# EAGLE board Logic_Level_Converter-Panel-v13 (EAGLE 6.4), part 1 of 3
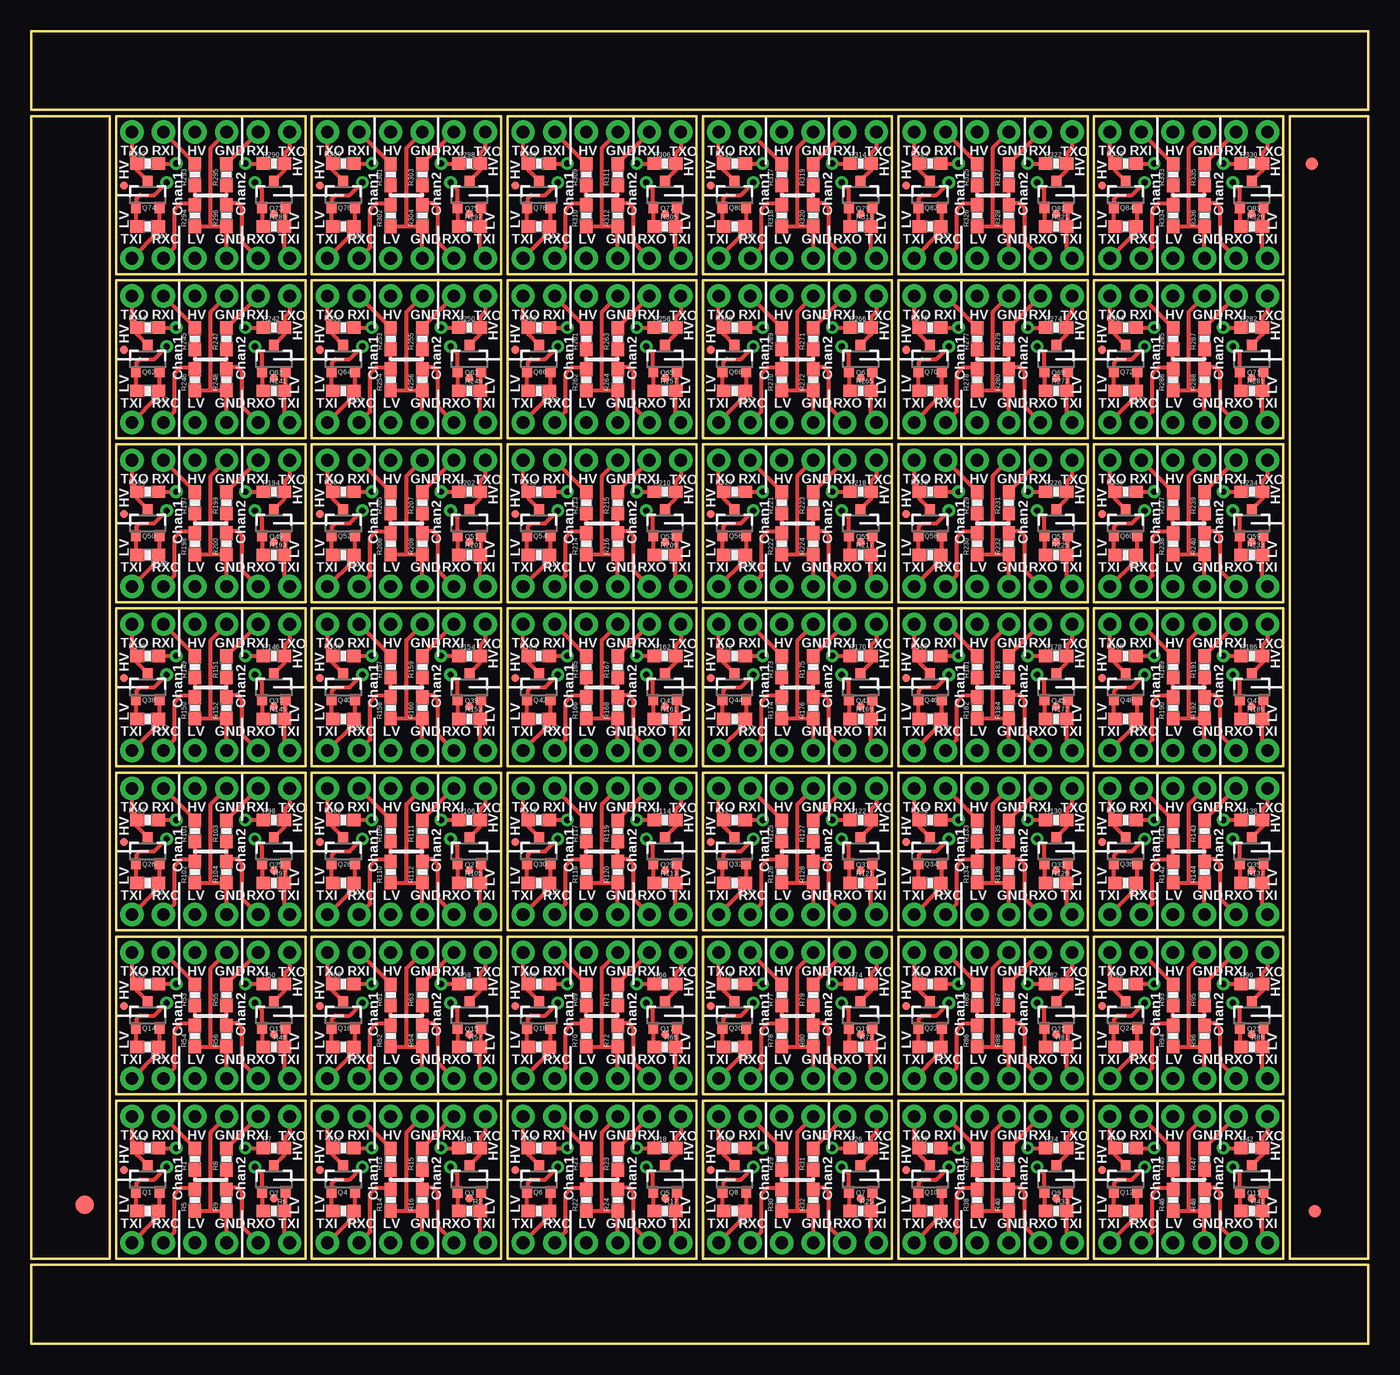
[diagram p0: board, top side]
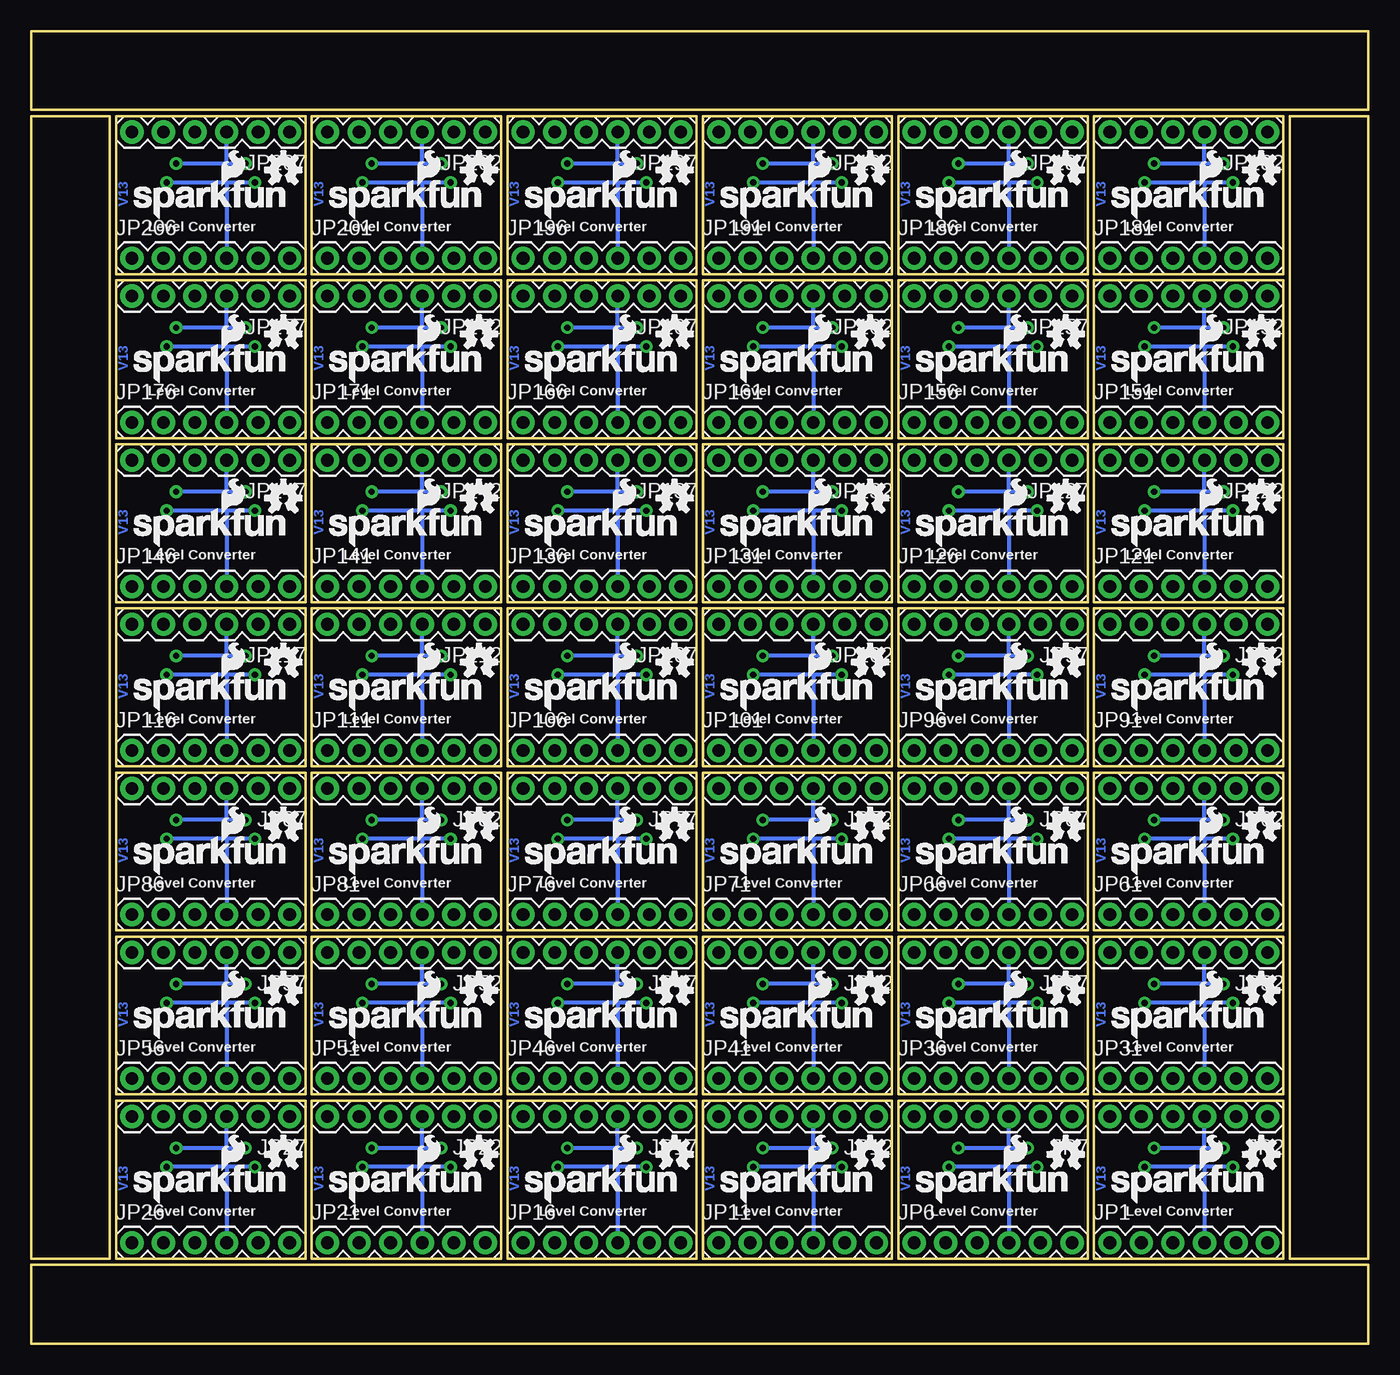
[diagram p1: board, bottom side, seen from below]

Size 107.7 x 105.66 mm. Coordinates in mm from the lower left corner, seen from the top.
Outline: 188 segments
Copper layers (1*16): Top 0.035mm / dielectric 1.5mm / Bottom 0.035mm
Design rules "SparkFun *": minimum track width 7mil, minimum drill 15mil, track to track 8mil, track to pad 8mil, pad to pad 8mil, via to via 8mil, smd to smd 8mil, copper to edge 8mil, drill to drill 8mil, minimum pad ring 12mil, minimum via ring 10mil, stop-mask expansion 4mil, vias tented up to drill 20mil, thermal gap 10mil

## Footprints (pad centres in the part's own frame; a part is rotated, then mirrored left to right if it is on the bottom)
FIDUCIAL-1.5X3 = smd 1.5 x 1.5: 1 0,0
FIDUCIAL-1X2 = smd 1 x 1: 1 0,0
1X06 = drill 1.016 pad 1.88: 1 0,0; 2 2.54,0; 3 5.08,0; 4 7.62,0; 5 10.16,0; 6 12.7,0
MICRO-FIDUCIAL = smd 0.635 x 0.635: 1 0,0
SOT23-3 = smd 0.8 x 0.9: 1 -0.95,-1; 2 0.95,-1; 3 0,1.1
0603-RES = smd 1.1 x 1: 1 -0.85,0; 2 0.85,0

## Placement (x,y rotation side)
E$1  [FIDUCIAL-1.5X3]  4.32,11.18 0 top
E$4  [FIDUCIAL-1X2]  103.38,10.67 0 top
E$5  [FIDUCIAL-1X2]  103.12,95 180 top
JP1  [1X06]  20.83,8.13 0 bottom
JP2  [1X06]  8.13,18.29 180 bottom
JP3  FIDUCIALUFIDUCIAL  [MICRO-FIDUCIAL]  19.56,11.68 0 top
JP4  FIDUCIALUFIDUCIAL  [MICRO-FIDUCIAL]  7.49,13.97 0 top
JP5  LOGO-SFENW2  [SFE-NEW-WEB]  20.7,11.3 0 bottom
JP6  [1X06]  36.58,8.13 0 bottom
JP7  [1X06]  23.88,18.29 180 bottom
JP8  FIDUCIALUFIDUCIAL  [MICRO-FIDUCIAL]  35.31,11.68 0 top
JP9  FIDUCIALUFIDUCIAL  [MICRO-FIDUCIAL]  23.24,13.97 0 top
JP10  LOGO-SFENW2  [SFE-NEW-WEB]  36.45,11.3 0 bottom
JP11  [1X06]  52.32,8.13 0 bottom
JP12  [1X06]  39.62,18.29 180 bottom
JP13  FIDUCIALUFIDUCIAL  [MICRO-FIDUCIAL]  51.05,11.68 0 top
JP14  FIDUCIALUFIDUCIAL  [MICRO-FIDUCIAL]  38.99,13.97 0 top
JP15  LOGO-SFENW2  [SFE-NEW-WEB]  52.2,11.3 0 bottom
JP16  [1X06]  68.07,8.13 0 bottom
JP17  [1X06]  55.37,18.29 180 bottom
JP18  FIDUCIALUFIDUCIAL  [MICRO-FIDUCIAL]  66.8,11.68 0 top
JP19  FIDUCIALUFIDUCIAL  [MICRO-FIDUCIAL]  54.74,13.97 0 top
JP20  LOGO-SFENW2  [SFE-NEW-WEB]  67.94,11.3 0 bottom
JP21  [1X06]  83.82,8.13 0 bottom
JP22  [1X06]  71.12,18.29 180 bottom
JP23  FIDUCIALUFIDUCIAL  [MICRO-FIDUCIAL]  82.55,11.68 0 top
JP24  FIDUCIALUFIDUCIAL  [MICRO-FIDUCIAL]  70.48,13.97 0 top
JP25  LOGO-SFENW2  [SFE-NEW-WEB]  83.69,11.3 0 bottom
JP26  [1X06]  99.57,8.13 0 bottom
JP27  [1X06]  86.87,18.29 180 bottom
JP28  FIDUCIALUFIDUCIAL  [MICRO-FIDUCIAL]  98.3,11.68 0 top
JP29  FIDUCIALUFIDUCIAL  [MICRO-FIDUCIAL]  86.23,13.97 0 top
JP30  LOGO-SFENW2  [SFE-NEW-WEB]  99.44,11.3 0 bottom
JP31  [1X06]  20.83,21.34 0 bottom
JP32  [1X06]  8.13,31.5 180 bottom
JP33  FIDUCIALUFIDUCIAL  [MICRO-FIDUCIAL]  19.56,24.89 0 top
JP34  FIDUCIALUFIDUCIAL  [MICRO-FIDUCIAL]  7.49,27.18 0 top
JP35  LOGO-SFENW2  [SFE-NEW-WEB]  20.7,24.51 0 bottom
JP36  [1X06]  36.58,21.34 0 bottom
JP37  [1X06]  23.88,31.5 180 bottom
JP38  FIDUCIALUFIDUCIAL  [MICRO-FIDUCIAL]  35.31,24.89 0 top
JP39  FIDUCIALUFIDUCIAL  [MICRO-FIDUCIAL]  23.24,27.18 0 top
JP40  LOGO-SFENW2  [SFE-NEW-WEB]  36.45,24.51 0 bottom
JP41  [1X06]  52.32,21.34 0 bottom
JP42  [1X06]  39.62,31.5 180 bottom
JP43  FIDUCIALUFIDUCIAL  [MICRO-FIDUCIAL]  51.05,24.89 0 top
JP44  FIDUCIALUFIDUCIAL  [MICRO-FIDUCIAL]  38.99,27.18 0 top
JP45  LOGO-SFENW2  [SFE-NEW-WEB]  52.2,24.51 0 bottom
JP46  [1X06]  68.07,21.34 0 bottom
JP47  [1X06]  55.37,31.5 180 bottom
JP48  FIDUCIALUFIDUCIAL  [MICRO-FIDUCIAL]  66.8,24.89 0 top
JP49  FIDUCIALUFIDUCIAL  [MICRO-FIDUCIAL]  54.74,27.18 0 top
JP50  LOGO-SFENW2  [SFE-NEW-WEB]  67.94,24.51 0 bottom
JP51  [1X06]  83.82,21.34 0 bottom
JP52  [1X06]  71.12,31.5 180 bottom
JP53  FIDUCIALUFIDUCIAL  [MICRO-FIDUCIAL]  82.55,24.89 0 top
JP54  FIDUCIALUFIDUCIAL  [MICRO-FIDUCIAL]  70.48,27.18 0 top
JP55  LOGO-SFENW2  [SFE-NEW-WEB]  83.69,24.51 0 bottom
JP56  [1X06]  99.57,21.34 0 bottom
JP57  [1X06]  86.87,31.5 180 bottom
JP58  FIDUCIALUFIDUCIAL  [MICRO-FIDUCIAL]  98.3,24.89 0 top
JP59  FIDUCIALUFIDUCIAL  [MICRO-FIDUCIAL]  86.23,27.18 0 top
JP60  LOGO-SFENW2  [SFE-NEW-WEB]  99.44,24.51 0 bottom
JP61  [1X06]  20.83,34.54 0 bottom
JP62  [1X06]  8.13,44.7 180 bottom
JP63  FIDUCIALUFIDUCIAL  [MICRO-FIDUCIAL]  19.56,38.1 0 top
JP64  FIDUCIALUFIDUCIAL  [MICRO-FIDUCIAL]  7.49,40.39 0 top
JP65  LOGO-SFENW2  [SFE-NEW-WEB]  20.7,37.72 0 bottom
JP66  [1X06]  36.58,34.54 0 bottom
JP67  [1X06]  23.88,44.7 180 bottom
JP68  FIDUCIALUFIDUCIAL  [MICRO-FIDUCIAL]  35.31,38.1 0 top
JP69  FIDUCIALUFIDUCIAL  [MICRO-FIDUCIAL]  23.24,40.39 0 top
JP70  LOGO-SFENW2  [SFE-NEW-WEB]  36.45,37.72 0 bottom
JP71  [1X06]  52.32,34.54 0 bottom
JP72  [1X06]  39.62,44.7 180 bottom
JP73  FIDUCIALUFIDUCIAL  [MICRO-FIDUCIAL]  51.05,38.1 0 top
JP74  FIDUCIALUFIDUCIAL  [MICRO-FIDUCIAL]  38.99,40.39 0 top
JP75  LOGO-SFENW2  [SFE-NEW-WEB]  52.2,37.72 0 bottom
JP76  [1X06]  68.07,34.54 0 bottom
JP77  [1X06]  55.37,44.7 180 bottom
JP78  FIDUCIALUFIDUCIAL  [MICRO-FIDUCIAL]  66.8,38.1 0 top
JP79  FIDUCIALUFIDUCIAL  [MICRO-FIDUCIAL]  54.74,40.39 0 top
JP80  LOGO-SFENW2  [SFE-NEW-WEB]  67.94,37.72 0 bottom
JP81  [1X06]  83.82,34.54 0 bottom
JP82  [1X06]  71.12,44.7 180 bottom
JP83  FIDUCIALUFIDUCIAL  [MICRO-FIDUCIAL]  82.55,38.1 0 top
JP84  FIDUCIALUFIDUCIAL  [MICRO-FIDUCIAL]  70.48,40.39 0 top
JP85  LOGO-SFENW2  [SFE-NEW-WEB]  83.69,37.72 0 bottom
JP86  [1X06]  99.57,34.54 0 bottom
JP87  [1X06]  86.87,44.7 180 bottom
JP88  FIDUCIALUFIDUCIAL  [MICRO-FIDUCIAL]  98.3,38.1 0 top
JP89  FIDUCIALUFIDUCIAL  [MICRO-FIDUCIAL]  86.23,40.39 0 top
JP90  LOGO-SFENW2  [SFE-NEW-WEB]  99.44,37.72 0 bottom
JP91  [1X06]  20.83,47.75 0 bottom
JP92  [1X06]  8.13,57.91 180 bottom
JP93  FIDUCIALUFIDUCIAL  [MICRO-FIDUCIAL]  19.56,51.31 0 top
JP94  FIDUCIALUFIDUCIAL  [MICRO-FIDUCIAL]  7.49,53.59 0 top
JP95  LOGO-SFENW2  [SFE-NEW-WEB]  20.7,50.93 0 bottom
JP96  [1X06]  36.58,47.75 0 bottom
JP97  [1X06]  23.88,57.91 180 bottom
JP98  FIDUCIALUFIDUCIAL  [MICRO-FIDUCIAL]  35.31,51.31 0 top
JP99  FIDUCIALUFIDUCIAL  [MICRO-FIDUCIAL]  23.24,53.59 0 top
JP100  LOGO-SFENW2  [SFE-NEW-WEB]  36.45,50.93 0 bottom
JP101  [1X06]  52.32,47.75 0 bottom
JP102  [1X06]  39.62,57.91 180 bottom
JP103  FIDUCIALUFIDUCIAL  [MICRO-FIDUCIAL]  51.05,51.31 0 top
JP104  FIDUCIALUFIDUCIAL  [MICRO-FIDUCIAL]  38.99,53.59 0 top
JP105  LOGO-SFENW2  [SFE-NEW-WEB]  52.2,50.93 0 bottom
JP106  [1X06]  68.07,47.75 0 bottom
JP107  [1X06]  55.37,57.91 180 bottom
JP108  FIDUCIALUFIDUCIAL  [MICRO-FIDUCIAL]  66.8,51.31 0 top
JP109  FIDUCIALUFIDUCIAL  [MICRO-FIDUCIAL]  54.74,53.59 0 top
JP110  LOGO-SFENW2  [SFE-NEW-WEB]  67.94,50.93 0 bottom
JP111  [1X06]  83.82,47.75 0 bottom
JP112  [1X06]  71.12,57.91 180 bottom
JP113  FIDUCIALUFIDUCIAL  [MICRO-FIDUCIAL]  82.55,51.31 0 top
JP114  FIDUCIALUFIDUCIAL  [MICRO-FIDUCIAL]  70.48,53.59 0 top
JP115  LOGO-SFENW2  [SFE-NEW-WEB]  83.69,50.93 0 bottom
JP116  [1X06]  99.57,47.75 0 bottom
JP117  [1X06]  86.87,57.91 180 bottom
JP118  FIDUCIALUFIDUCIAL  [MICRO-FIDUCIAL]  98.3,51.31 0 top
JP119  FIDUCIALUFIDUCIAL  [MICRO-FIDUCIAL]  86.23,53.59 0 top
JP120  LOGO-SFENW2  [SFE-NEW-WEB]  99.44,50.93 0 bottom
JP121  [1X06]  20.83,60.96 0 bottom
JP122  [1X06]  8.13,71.12 180 bottom
JP123  FIDUCIALUFIDUCIAL  [MICRO-FIDUCIAL]  19.56,64.52 0 top
JP124  FIDUCIALUFIDUCIAL  [MICRO-FIDUCIAL]  7.49,66.8 0 top
JP125  LOGO-SFENW2  [SFE-NEW-WEB]  20.7,64.14 0 bottom
JP126  [1X06]  36.58,60.96 0 bottom
JP127  [1X06]  23.88,71.12 180 bottom
JP128  FIDUCIALUFIDUCIAL  [MICRO-FIDUCIAL]  35.31,64.52 0 top
JP129  FIDUCIALUFIDUCIAL  [MICRO-FIDUCIAL]  23.24,66.8 0 top
JP130  LOGO-SFENW2  [SFE-NEW-WEB]  36.45,64.14 0 bottom
JP131  [1X06]  52.32,60.96 0 bottom
JP132  [1X06]  39.62,71.12 180 bottom
JP133  FIDUCIALUFIDUCIAL  [MICRO-FIDUCIAL]  51.05,64.52 0 top
JP134  FIDUCIALUFIDUCIAL  [MICRO-FIDUCIAL]  38.99,66.8 0 top
JP135  LOGO-SFENW2  [SFE-NEW-WEB]  52.2,64.14 0 bottom
JP136  [1X06]  68.07,60.96 0 bottom
JP137  [1X06]  55.37,71.12 180 bottom
JP138  FIDUCIALUFIDUCIAL  [MICRO-FIDUCIAL]  66.8,64.52 0 top
JP139  FIDUCIALUFIDUCIAL  [MICRO-FIDUCIAL]  54.74,66.8 0 top
JP140  LOGO-SFENW2  [SFE-NEW-WEB]  67.94,64.14 0 bottom
JP141  [1X06]  83.82,60.96 0 bottom
JP142  [1X06]  71.12,71.12 180 bottom
JP143  FIDUCIALUFIDUCIAL  [MICRO-FIDUCIAL]  82.55,64.52 0 top
JP144  FIDUCIALUFIDUCIAL  [MICRO-FIDUCIAL]  70.48,66.8 0 top
JP145  LOGO-SFENW2  [SFE-NEW-WEB]  83.69,64.14 0 bottom
JP146  [1X06]  99.57,60.96 0 bottom
JP147  [1X06]  86.87,71.12 180 bottom
JP148  FIDUCIALUFIDUCIAL  [MICRO-FIDUCIAL]  98.3,64.52 0 top
JP149  FIDUCIALUFIDUCIAL  [MICRO-FIDUCIAL]  86.23,66.8 0 top
JP150  LOGO-SFENW2  [SFE-NEW-WEB]  99.44,64.14 0 bottom
JP151  [1X06]  20.83,74.17 0 bottom
JP152  [1X06]  8.13,84.33 180 bottom
JP153  FIDUCIALUFIDUCIAL  [MICRO-FIDUCIAL]  19.56,77.72 0 top
JP154  FIDUCIALUFIDUCIAL  [MICRO-FIDUCIAL]  7.49,80.01 0 top
JP155  LOGO-SFENW2  [SFE-NEW-WEB]  20.7,77.34 0 bottom
JP156  [1X06]  36.58,74.17 0 bottom
JP157  [1X06]  23.88,84.33 180 bottom
JP158  FIDUCIALUFIDUCIAL  [MICRO-FIDUCIAL]  35.31,77.72 0 top
JP159  FIDUCIALUFIDUCIAL  [MICRO-FIDUCIAL]  23.24,80.01 0 top
JP160  LOGO-SFENW2  [SFE-NEW-WEB]  36.45,77.34 0 bottom
JP161  [1X06]  52.32,74.17 0 bottom
JP162  [1X06]  39.62,84.33 180 bottom
JP163  FIDUCIALUFIDUCIAL  [MICRO-FIDUCIAL]  51.05,77.72 0 top
JP164  FIDUCIALUFIDUCIAL  [MICRO-FIDUCIAL]  38.99,80.01 0 top
JP165  LOGO-SFENW2  [SFE-NEW-WEB]  52.2,77.34 0 bottom
JP166  [1X06]  68.07,74.17 0 bottom
JP167  [1X06]  55.37,84.33 180 bottom
JP168  FIDUCIALUFIDUCIAL  [MICRO-FIDUCIAL]  66.8,77.72 0 top
JP169  FIDUCIALUFIDUCIAL  [MICRO-FIDUCIAL]  54.74,80.01 0 top
JP170  LOGO-SFENW2  [SFE-NEW-WEB]  67.94,77.34 0 bottom
JP171  [1X06]  83.82,74.17 0 bottom
JP172  [1X06]  71.12,84.33 180 bottom
JP173  FIDUCIALUFIDUCIAL  [MICRO-FIDUCIAL]  82.55,77.72 0 top
JP174  FIDUCIALUFIDUCIAL  [MICRO-FIDUCIAL]  70.48,80.01 0 top
JP175  LOGO-SFENW2  [SFE-NEW-WEB]  83.69,77.34 0 bottom
JP176  [1X06]  99.57,74.17 0 bottom
JP177  [1X06]  86.87,84.33 180 bottom
JP178  FIDUCIALUFIDUCIAL  [MICRO-FIDUCIAL]  98.3,77.72 0 top
JP179  FIDUCIALUFIDUCIAL  [MICRO-FIDUCIAL]  86.23,80.01 0 top
JP180  LOGO-SFENW2  [SFE-NEW-WEB]  99.44,77.34 0 bottom
JP181  [1X06]  20.83,87.38 0 bottom
JP182  [1X06]  8.13,97.54 180 bottom
JP183  FIDUCIALUFIDUCIAL  [MICRO-FIDUCIAL]  19.56,90.93 0 top
JP184  FIDUCIALUFIDUCIAL  [MICRO-FIDUCIAL]  7.49,93.22 0 top
JP185  LOGO-SFENW2  [SFE-NEW-WEB]  20.7,90.55 0 bottom
JP186  [1X06]  36.58,87.38 0 bottom
JP187  [1X06]  23.88,97.54 180 bottom
JP188  FIDUCIALUFIDUCIAL  [MICRO-FIDUCIAL]  35.31,90.93 0 top
JP189  FIDUCIALUFIDUCIAL  [MICRO-FIDUCIAL]  23.24,93.22 0 top
JP190  LOGO-SFENW2  [SFE-NEW-WEB]  36.45,90.55 0 bottom
JP191  [1X06]  52.32,87.38 0 bottom
JP192  [1X06]  39.62,97.54 180 bottom
JP193  FIDUCIALUFIDUCIAL  [MICRO-FIDUCIAL]  51.05,90.93 0 top
JP194  FIDUCIALUFIDUCIAL  [MICRO-FIDUCIAL]  38.99,93.22 0 top
JP195  LOGO-SFENW2  [SFE-NEW-WEB]  52.2,90.55 0 bottom
JP196  [1X06]  68.07,87.38 0 bottom
JP197  [1X06]  55.37,97.54 180 bottom
JP198  FIDUCIALUFIDUCIAL  [MICRO-FIDUCIAL]  66.8,90.93 0 top
JP199  FIDUCIALUFIDUCIAL  [MICRO-FIDUCIAL]  54.74,93.22 0 top
JP200  LOGO-SFENW2  [SFE-NEW-WEB]  67.94,90.55 0 bottom
JP201  [1X06]  83.82,87.38 0 bottom
JP202  [1X06]  71.12,97.54 180 bottom
JP203  FIDUCIALUFIDUCIAL  [MICRO-FIDUCIAL]  82.55,90.93 0 top
JP204  FIDUCIALUFIDUCIAL  [MICRO-FIDUCIAL]  70.48,93.22 0 top
JP205  LOGO-SFENW2  [SFE-NEW-WEB]  83.69,90.55 0 bottom
JP206  [1X06]  99.57,87.38 0 bottom
JP207  [1X06]  86.87,97.54 180 bottom
JP208  FIDUCIALUFIDUCIAL  [MICRO-FIDUCIAL]  98.3,90.93 0 top
JP209  FIDUCIALUFIDUCIAL  [MICRO-FIDUCIAL]  86.23,93.22 0 top
JP210  LOGO-SFENW2  [SFE-NEW-WEB]  99.44,90.55 0 bottom
Q1  BSS138  [SOT23-3]  9.4,13.21 0 top
Q2  BSS138  [SOT23-3]  19.56,13.21 0 top
Q3  BSS138  [SOT23-3]  35.31,13.21 0 top
Q4  BSS138  [SOT23-3]  25.15,13.21 0 top
Q5  BSS138  [SOT23-3]  51.05,13.21 0 top
Q6  BSS138  [SOT23-3]  40.89,13.21 0 top
Q7  BSS138  [SOT23-3]  66.8,13.21 0 top
Q8  BSS138  [SOT23-3]  56.64,13.21 0 top
Q9  BSS138  [SOT23-3]  82.55,13.21 0 top
Q10  BSS138  [SOT23-3]  72.39,13.21 0 top
Q11  BSS138  [SOT23-3]  98.3,13.21 0 top
Q12  BSS138  [SOT23-3]  88.14,13.21 0 top
Q13  BSS138  [SOT23-3]  19.56,26.42 0 top
Q14  BSS138  [SOT23-3]  9.4,26.42 0 top
Q15  BSS138  [SOT23-3]  35.31,26.42 0 top
Q16  BSS138  [SOT23-3]  25.15,26.42 0 top
Q17  BSS138  [SOT23-3]  51.05,26.42 0 top
Q18  BSS138  [SOT23-3]  40.89,26.42 0 top
Q19  BSS138  [SOT23-3]  66.8,26.42 0 top
Q20  BSS138  [SOT23-3]  56.64,26.42 0 top
Q21  BSS138  [SOT23-3]  82.55,26.42 0 top
Q22  BSS138  [SOT23-3]  72.39,26.42 0 top
Q23  BSS138  [SOT23-3]  98.3,26.42 0 top
Q24  BSS138  [SOT23-3]  88.14,26.42 0 top
Q25  BSS138  [SOT23-3]  19.56,39.62 0 top
Q26  BSS138  [SOT23-3]  9.4,39.62 0 top
Q27  BSS138  [SOT23-3]  35.31,39.62 0 top
Q28  BSS138  [SOT23-3]  25.15,39.62 0 top
Q29  BSS138  [SOT23-3]  51.05,39.62 0 top
Q30  BSS138  [SOT23-3]  40.89,39.62 0 top
Q31  BSS138  [SOT23-3]  66.8,39.62 0 top
Q32  BSS138  [SOT23-3]  56.64,39.62 0 top
Q33  BSS138  [SOT23-3]  82.55,39.62 0 top
Q34  BSS138  [SOT23-3]  72.39,39.62 0 top
Q35  BSS138  [SOT23-3]  98.3,39.62 0 top
Q36  BSS138  [SOT23-3]  88.14,39.62 0 top
Q37  BSS138  [SOT23-3]  19.56,52.83 0 top
Q38  BSS138  [SOT23-3]  9.4,52.83 0 top
Q39  BSS138  [SOT23-3]  35.31,52.83 0 top
Q40  BSS138  [SOT23-3]  25.15,52.83 0 top
Q41  BSS138  [SOT23-3]  51.05,52.83 0 top
Q42  BSS138  [SOT23-3]  40.89,52.83 0 top
Q43  BSS138  [SOT23-3]  66.8,52.83 0 top
Q44  BSS138  [SOT23-3]  56.64,52.83 0 top
Q45  BSS138  [SOT23-3]  82.55,52.83 0 top
Q46  BSS138  [SOT23-3]  72.39,52.83 0 top
Q47  BSS138  [SOT23-3]  98.3,52.83 0 top
Q48  BSS138  [SOT23-3]  88.14,52.83 0 top
Q49  BSS138  [SOT23-3]  19.56,66.04 0 top
Q50  BSS138  [SOT23-3]  9.4,66.04 0 top
Q51  BSS138  [SOT23-3]  35.31,66.04 0 top
Q52  BSS138  [SOT23-3]  25.15,66.04 0 top
Q53  BSS138  [SOT23-3]  51.05,66.04 0 top
Q54  BSS138  [SOT23-3]  40.89,66.04 0 top
Q55  BSS138  [SOT23-3]  66.8,66.04 0 top
Q56  BSS138  [SOT23-3]  56.64,66.04 0 top
Q57  BSS138  [SOT23-3]  82.55,66.04 0 top
Q58  BSS138  [SOT23-3]  72.39,66.04 0 top
Q59  BSS138  [SOT23-3]  98.3,66.04 0 top
Q60  BSS138  [SOT23-3]  88.14,66.04 0 top
Q61  BSS138  [SOT23-3]  19.56,79.25 0 top
Q62  BSS138  [SOT23-3]  9.4,79.25 0 top
Q63  BSS138  [SOT23-3]  35.31,79.25 0 top
Q64  BSS138  [SOT23-3]  25.15,79.25 0 top
Q65  BSS138  [SOT23-3]  51.05,79.25 0 top
Q66  BSS138  [SOT23-3]  40.89,79.25 0 top
Q67  BSS138  [SOT23-3]  66.8,79.25 0 top
Q68  BSS138  [SOT23-3]  56.64,79.25 0 top
Q69  BSS138  [SOT23-3]  82.55,79.25 0 top
Q70  BSS138  [SOT23-3]  72.39,79.25 0 top
Q71  BSS138  [SOT23-3]  98.3,79.25 0 top
Q72  BSS138  [SOT23-3]  88.14,79.25 0 top
Q73  BSS138  [SOT23-3]  19.56,92.46 0 top
Q74  BSS138  [SOT23-3]  9.4,92.46 0 top
Q75  BSS138  [SOT23-3]  35.31,92.46 0 top
Q76  BSS138  [SOT23-3]  25.15,92.46 0 top
Q77  BSS138  [SOT23-3]  51.05,92.46 0 top
Q78  BSS138  [SOT23-3]  40.89,92.46 0 top
Q79  BSS138  [SOT23-3]  66.8,92.46 0 top
Q80  BSS138  [SOT23-3]  56.64,92.46 0 top
Q81  BSS138  [SOT23-3]  82.55,92.46 0 top
Q82  BSS138  [SOT23-3]  72.39,92.46 0 top
Q83  BSS138  [SOT23-3]  98.3,92.46 0 top
Q84  BSS138  [SOT23-3]  88.14,92.46 0 top
R1  10K  [0603-RES]  13.21,14.86 90 top
R2  10K  [0603-RES]  35.31,10.67 0 top
R3  10K  [0603-RES]  9.4,10.67 0 top
R4  10K  [0603-RES]  9.4,15.75 180 top
R5  20K  [0603-RES]  13.21,11.56 90 top
R6  10K  [0603-RES]  19.56,10.67 0 top
R7  10K  [0603-RES]  19.56,15.75 0 top
R8  10K  [0603-RES]  15.75,14.86 90 top
R9  20K  [0603-RES]  15.75,11.56 90 top
R10  10K  [0603-RES]  35.31,15.75 0 top
R11  10K  [0603-RES]  25.15,10.67 0 top
R12  10K  [0603-RES]  25.15,15.75 180 top
R13  10K  [0603-RES]  28.96,14.86 90 top
R14  20K  [0603-RES]  28.96,11.56 90 top
R15  10K  [0603-RES]  31.5,14.86 90 top
R16  20K  [0603-RES]  31.5,11.56 90 top
R17  10K  [0603-RES]  51.05,10.67 0 top
R18  10K  [0603-RES]  51.05,15.75 0 top
R19  10K  [0603-RES]  40.89,10.67 0 top
R20  10K  [0603-RES]  40.89,15.75 180 top
R21  10K  [0603-RES]  44.7,14.86 90 top
R22  20K  [0603-RES]  44.7,11.56 90 top
R23  10K  [0603-RES]  47.24,14.86 90 top
R24  20K  [0603-RES]  47.24,11.56 90 top
R25  10K  [0603-RES]  66.8,10.67 0 top
R26  10K  [0603-RES]  66.8,15.75 0 top
R27  10K  [0603-RES]  56.64,10.67 0 top
R28  10K  [0603-RES]  56.64,15.75 180 top
R29  10K  [0603-RES]  60.45,14.86 90 top
R30  20K  [0603-RES]  60.45,11.56 90 top
R31  10K  [0603-RES]  62.99,14.86 90 top
R32  20K  [0603-RES]  62.99,11.56 90 top
R33  10K  [0603-RES]  82.55,10.67 0 top
R34  10K  [0603-RES]  82.55,15.75 0 top
R35  10K  [0603-RES]  72.39,10.67 0 top
R36  10K  [0603-RES]  72.39,15.75 180 top
R37  10K  [0603-RES]  76.2,14.86 90 top
R38  20K  [0603-RES]  76.2,11.56 90 top
R39  10K  [0603-RES]  78.74,14.86 90 top
R40  20K  [0603-RES]  78.74,11.56 90 top
R41  10K  [0603-RES]  98.3,10.67 0 top
R42  10K  [0603-RES]  98.3,15.75 0 top
R43  10K  [0603-RES]  88.14,10.67 0 top
R44  10K  [0603-RES]  88.14,15.75 180 top
R45  10K  [0603-RES]  91.95,14.86 90 top
R46  20K  [0603-RES]  91.95,11.56 90 top
R47  10K  [0603-RES]  94.49,14.86 90 top
R48  20K  [0603-RES]  94.49,11.56 90 top
R49  10K  [0603-RES]  19.56,23.88 0 top
R50  10K  [0603-RES]  19.56,28.96 0 top
R51  10K  [0603-RES]  9.4,23.88 0 top
R52  10K  [0603-RES]  9.4,28.96 180 top
R53  10K  [0603-RES]  13.21,28.07 90 top
R54  20K  [0603-RES]  13.21,24.77 90 top
R55  10K  [0603-RES]  15.75,28.07 90 top
R56  20K  [0603-RES]  15.75,24.77 90 top
R57  10K  [0603-RES]  35.31,23.88 0 top
R58  10K  [0603-RES]  35.31,28.96 0 top
R59  10K  [0603-RES]  25.15,23.88 0 top
R60  10K  [0603-RES]  25.15,28.96 180 top
R61  10K  [0603-RES]  28.96,28.07 90 top
R62  20K  [0603-RES]  28.96,24.77 90 top
R63  10K  [0603-RES]  31.5,28.07 90 top
R64  20K  [0603-RES]  31.5,24.77 90 top
R65  10K  [0603-RES]  51.05,23.88 0 top
R66  10K  [0603-RES]  51.05,28.96 0 top
R67  10K  [0603-RES]  40.89,23.88 0 top
R68  10K  [0603-RES]  40.89,28.96 180 top
R69  10K  [0603-RES]  44.7,28.07 90 top
R70  20K  [0603-RES]  44.7,24.77 90 top
R71  10K  [0603-RES]  47.24,28.07 90 top
R72  20K  [0603-RES]  47.24,24.77 90 top
R73  10K  [0603-RES]  66.8,23.88 0 top
R74  10K  [0603-RES]  66.8,28.96 0 top
R75  10K  [0603-RES]  56.64,23.88 0 top
R76  10K  [0603-RES]  56.64,28.96 180 top
R77  10K  [0603-RES]  60.45,28.07 90 top
R78  20K  [0603-RES]  60.45,24.77 90 top
R79  10K  [0603-RES]  62.99,28.07 90 top
R80  20K  [0603-RES]  62.99,24.77 90 top
R81  10K  [0603-RES]  82.55,23.88 0 top
R82  10K  [0603-RES]  82.55,28.96 0 top
R83  10K  [0603-RES]  72.39,23.88 0 top
R84  10K  [0603-RES]  72.39,28.96 180 top
R85  10K  [0603-RES]  76.2,28.07 90 top
R86  20K  [0603-RES]  76.2,24.77 90 top
R87  10K  [0603-RES]  78.74,28.07 90 top
R88  20K  [0603-RES]  78.74,24.77 90 top
R89  10K  [0603-RES]  98.3,23.88 0 top
R90  10K  [0603-RES]  98.3,28.96 0 top
R91  10K  [0603-RES]  88.14,23.88 0 top
R92  10K  [0603-RES]  88.14,28.96 180 top
R93  10K  [0603-RES]  91.95,28.07 90 top
R94  20K  [0603-RES]  91.95,24.77 90 top
R95  10K  [0603-RES]  94.49,28.07 90 top
R96  20K  [0603-RES]  94.49,24.77 90 top
R97  10K  [0603-RES]  19.56,37.08 0 top
R98  10K  [0603-RES]  19.56,42.16 0 top
R99  10K  [0603-RES]  9.4,37.08 0 top
R100  10K  [0603-RES]  9.4,42.16 180 top
R101  10K  [0603-RES]  13.21,41.27 90 top
R102  20K  [0603-RES]  13.21,37.97 90 top
R103  10K  [0603-RES]  15.75,41.27 90 top
R104  20K  [0603-RES]  15.75,37.97 90 top
R105  10K  [0603-RES]  35.31,37.08 0 top
R106  10K  [0603-RES]  35.31,42.16 0 top
R107  10K  [0603-RES]  25.15,37.08 0 top
R108  10K  [0603-RES]  25.15,42.16 180 top
R109  10K  [0603-RES]  28.96,41.27 90 top
R110  20K  [0603-RES]  28.96,37.97 90 top
R111  10K  [0603-RES]  31.5,41.27 90 top
R112  20K  [0603-RES]  31.5,37.97 90 top
R113  10K  [0603-RES]  51.05,37.08 0 top
R114  10K  [0603-RES]  51.05,42.16 0 top
R115  10K  [0603-RES]  40.89,37.08 0 top
R116  10K  [0603-RES]  40.89,42.16 180 top
R117  10K  [0603-RES]  44.7,41.27 90 top
R118  20K  [0603-RES]  44.7,37.97 90 top
R119  10K  [0603-RES]  47.24,41.27 90 top
R120  20K  [0603-RES]  47.24,37.97 90 top
R121  10K  [0603-RES]  66.8,37.08 0 top
R122  10K  [0603-RES]  66.8,42.16 0 top
R123  10K  [0603-RES]  56.64,37.08 0 top
R124  10K  [0603-RES]  56.64,42.16 180 top
R125  10K  [0603-RES]  60.45,41.27 90 top
R126  20K  [0603-RES]  60.45,37.97 90 top
R127  10K  [0603-RES]  62.99,41.27 90 top
R128  20K  [0603-RES]  62.99,37.97 90 top
R129  10K  [0603-RES]  82.55,37.08 0 top
R130  10K  [0603-RES]  82.55,42.16 0 top
R131  10K  [0603-RES]  72.39,37.08 0 top
R132  10K  [0603-RES]  72.39,42.16 180 top
R133  10K  [0603-RES]  76.2,41.27 90 top
R134  20K  [0603-RES]  76.2,37.97 90 top
R135  10K  [0603-RES]  78.74,41.27 90 top
R136  20K  [0603-RES]  78.74,37.97 90 top
R137  10K  [0603-RES]  98.3,37.08 0 top
R138  10K  [0603-RES]  98.3,42.16 0 top
R139  10K  [0603-RES]  88.14,37.08 0 top
R140  10K  [0603-RES]  88.14,42.16 180 top
R141  10K  [0603-RES]  91.95,41.27 90 top
R142  20K  [0603-RES]  91.95,37.97 90 top
R143  10K  [0603-RES]  94.49,41.27 90 top
R144  20K  [0603-RES]  94.49,37.97 90 top
R145  10K  [0603-RES]  19.56,50.29 0 top
R146  10K  [0603-RES]  19.56,55.37 0 top
R147  10K  [0603-RES]  9.4,50.29 0 top
R148  10K  [0603-RES]  9.4,55.37 180 top
R149  10K  [0603-RES]  13.21,54.48 90 top
R150  20K  [0603-RES]  13.21,51.18 90 top
R151  10K  [0603-RES]  15.75,54.48 90 top
R152  20K  [0603-RES]  15.75,51.18 90 top
R153  10K  [0603-RES]  35.31,50.29 0 top
R154  10K  [0603-RES]  35.31,55.37 0 top
R155  10K  [0603-RES]  25.15,50.29 0 top
R156  10K  [0603-RES]  25.15,55.37 180 top
R157  10K  [0603-RES]  28.96,54.48 90 top
R158  20K  [0603-RES]  28.96,51.18 90 top
R159  10K  [0603-RES]  31.5,54.48 90 top
R160  20K  [0603-RES]  31.5,51.18 90 top
R161  10K  [0603-RES]  51.05,50.29 0 top
R162  10K  [0603-RES]  51.05,55.37 0 top
R163  10K  [0603-RES]  40.89,50.29 0 top
R164  10K  [0603-RES]  40.89,55.37 180 top
R165  10K  [0603-RES]  44.7,54.48 90 top
R166  20K  [0603-RES]  44.7,51.18 90 top
R167  10K  [0603-RES]  47.24,54.48 90 top
R168  20K  [0603-RES]  47.24,51.18 90 top
R169  10K  [0603-RES]  66.8,50.29 0 top
R170  10K  [0603-RES]  66.8,55.37 0 top
R171  10K  [0603-RES]  56.64,50.29 0 top
R172  10K  [0603-RES]  56.64,55.37 180 top
R173  10K  [0603-RES]  60.45,54.48 90 top
R174  20K  [0603-RES]  60.45,51.18 90 top
R175  10K  [0603-RES]  62.99,54.48 90 top
R176  20K  [0603-RES]  62.99,51.18 90 top
R177  10K  [0603-RES]  82.55,50.29 0 top
R178  10K  [0603-RES]  82.55,55.37 0 top
R179  10K  [0603-RES]  72.39,50.29 0 top
R180  10K  [0603-RES]  72.39,55.37 180 top
R181  10K  [0603-RES]  76.2,54.48 90 top
R182  20K  [0603-RES]  76.2,51.18 90 top
R183  10K  [0603-RES]  78.74,54.48 90 top
R184  20K  [0603-RES]  78.74,51.18 90 top
R185  10K  [0603-RES]  98.3,50.29 0 top
R186  10K  [0603-RES]  98.3,55.37 0 top
R187  10K  [0603-RES]  88.14,50.29 0 top
R188  10K  [0603-RES]  88.14,55.37 180 top
R189  10K  [0603-RES]  91.95,54.48 90 top
R190  20K  [0603-RES]  91.95,51.18 90 top
R191  10K  [0603-RES]  94.49,54.48 90 top
R192  20K  [0603-RES]  94.49,51.18 90 top
R193  10K  [0603-RES]  19.56,63.5 0 top
R194  10K  [0603-RES]  19.56,68.58 0 top
R195  10K  [0603-RES]  9.4,63.5 0 top
R196  10K  [0603-RES]  9.4,68.58 180 top
R197  10K  [0603-RES]  13.21,67.69 90 top
R198  20K  [0603-RES]  13.21,64.39 90 top
R199  10K  [0603-RES]  15.75,67.69 90 top
R200  20K  [0603-RES]  15.75,64.39 90 top
R201  10K  [0603-RES]  35.31,63.5 0 top
R202  10K  [0603-RES]  35.31,68.58 0 top
R203  10K  [0603-RES]  25.15,63.5 0 top
R204  10K  [0603-RES]  25.15,68.58 180 top
R205  10K  [0603-RES]  28.96,67.69 90 top
R206  20K  [0603-RES]  28.96,64.39 90 top
R207  10K  [0603-RES]  31.5,67.69 90 top
R208  20K  [0603-RES]  31.5,64.39 90 top
R209  10K  [0603-RES]  51.05,63.5 0 top
R210  10K  [0603-RES]  51.05,68.58 0 top
R211  10K  [0603-RES]  40.89,63.5 0 top
R212  10K  [0603-RES]  40.89,68.58 180 top
R213  10K  [0603-RES]  44.7,67.69 90 top
R214  20K  [0603-RES]  44.7,64.39 90 top
R215  10K  [0603-RES]  47.24,67.69 90 top
R216  20K  [0603-RES]  47.24,64.39 90 top
R217  10K  [0603-RES]  66.8,63.5 0 top
R218  10K  [0603-RES]  66.8,68.58 0 top
R219  10K  [0603-RES]  56.64,63.5 0 top
R220  10K  [0603-RES]  56.64,68.58 180 top
R221  10K  [0603-RES]  60.45,67.69 90 top
R222  20K  [0603-RES]  60.45,64.39 90 top
R223  10K  [0603-RES]  62.99,67.69 90 top
R224  20K  [0603-RES]  62.99,64.39 90 top
R225  10K  [0603-RES]  82.55,63.5 0 top
R226  10K  [0603-RES]  82.55,68.58 0 top
R227  10K  [0603-RES]  72.39,63.5 0 top
R228  10K  [0603-RES]  72.39,68.58 180 top
R229  10K  [0603-RES]  76.2,67.69 90 top
R230  20K  [0603-RES]  76.2,64.39 90 top
R231  10K  [0603-RES]  78.74,67.69 90 top
R232  20K  [0603-RES]  78.74,64.39 90 top
R233  10K  [0603-RES]  98.3,63.5 0 top
R234  10K  [0603-RES]  98.3,68.58 0 top
R235  10K  [0603-RES]  88.14,63.5 0 top
R236  10K  [0603-RES]  88.14,68.58 180 top
R237  10K  [0603-RES]  91.95,67.69 90 top
R238  20K  [0603-RES]  91.95,64.39 90 top
R239  10K  [0603-RES]  94.49,67.69 90 top
R240  20K  [0603-RES]  94.49,64.39 90 top
R241  10K  [0603-RES]  19.56,76.71 0 top
R242  10K  [0603-RES]  19.56,81.79 0 top
R243  10K  [0603-RES]  9.4,76.71 0 top
R244  10K  [0603-RES]  9.4,81.79 180 top
R245  10K  [0603-RES]  13.21,80.9 90 top
R246  20K  [0603-RES]  13.21,77.6 90 top
R247  10K  [0603-RES]  15.75,80.9 90 top
R248  20K  [0603-RES]  15.75,77.6 90 top
R249  10K  [0603-RES]  35.31,76.71 0 top
R250  10K  [0603-RES]  35.31,81.79 0 top
R251  10K  [0603-RES]  25.15,76.71 0 top
R252  10K  [0603-RES]  25.15,81.79 180 top
R253  10K  [0603-RES]  28.96,80.9 90 top
R254  20K  [0603-RES]  28.96,77.6 90 top
R255  10K  [0603-RES]  31.5,80.9 90 top
R256  20K  [0603-RES]  31.5,77.6 90 top
R257  10K  [0603-RES]  51.05,76.71 0 top
R258  10K  [0603-RES]  51.05,81.79 0 top
R259  10K  [0603-RES]  40.89,76.71 0 top
R260  10K  [0603-RES]  40.89,81.79 180 top
R261  10K  [0603-RES]  44.7,80.9 90 top
R262  20K  [0603-RES]  44.7,77.6 90 top
R263  10K  [0603-RES]  47.24,80.9 90 top
R264  20K  [0603-RES]  47.24,77.6 90 top
R265  10K  [0603-RES]  66.8,76.71 0 top
R266  10K  [0603-RES]  66.8,81.79 0 top
R267  10K  [0603-RES]  56.64,76.71 0 top
R268  10K  [0603-RES]  56.64,81.79 180 top
R269  10K  [0603-RES]  60.45,80.9 90 top
R270  20K  [0603-RES]  60.45,77.6 90 top
R271  10K  [0603-RES]  62.99,80.9 90 top
R272  20K  [0603-RES]  62.99,77.6 90 top
R273  10K  [0603-RES]  82.55,76.71 0 top
R274  10K  [0603-RES]  82.55,81.79 0 top
R275  10K  [0603-RES]  72.39,76.71 0 top
R276  10K  [0603-RES]  72.39,81.79 180 top
R277  10K  [0603-RES]  76.2,80.9 90 top
R278  20K  [0603-RES]  76.2,77.6 90 top
R279  10K  [0603-RES]  78.74,80.9 90 top
R280  20K  [0603-RES]  78.74,77.6 90 top
R281  10K  [0603-RES]  98.3,76.71 0 top
R282  10K  [0603-RES]  98.3,81.79 0 top
R283  10K  [0603-RES]  88.14,76.71 0 top
R284  10K  [0603-RES]  88.14,81.79 180 top
R285  10K  [0603-RES]  91.95,80.9 90 top
R286  20K  [0603-RES]  91.95,77.6 90 top
R287  10K  [0603-RES]  94.49,80.9 90 top
R288  20K  [0603-RES]  94.49,77.6 90 top
R289  10K  [0603-RES]  19.56,89.92 0 top
R290  10K  [0603-RES]  19.56,95 0 top
R291  10K  [0603-RES]  9.4,89.92 0 top
R292  10K  [0603-RES]  9.4,95 180 top
R293  10K  [0603-RES]  13.21,94.11 90 top
R294  20K  [0603-RES]  13.21,90.81 90 top
R295  10K  [0603-RES]  15.75,94.11 90 top
R296  20K  [0603-RES]  15.75,90.81 90 top
R297  10K  [0603-RES]  35.31,89.92 0 top
R298  10K  [0603-RES]  35.31,95 0 top
R299  10K  [0603-RES]  25.15,89.92 0 top
R300  10K  [0603-RES]  25.15,95 180 top
R301  10K  [0603-RES]  28.96,94.11 90 top
R302  20K  [0603-RES]  28.96,90.81 90 top
R303  10K  [0603-RES]  31.5,94.11 90 top
R304  20K  [0603-RES]  31.5,90.81 90 top
R305  10K  [0603-RES]  51.05,89.92 0 top
R306  10K  [0603-RES]  51.05,95 0 top
R307  10K  [0603-RES]  40.89,89.92 0 top
R308  10K  [0603-RES]  40.89,95 180 top
R309  10K  [0603-RES]  44.7,94.11 90 top
R310  20K  [0603-RES]  44.7,90.81 90 top
R311  10K  [0603-RES]  47.24,94.11 90 top
R312  20K  [0603-RES]  47.24,90.81 90 top
R313  10K  [0603-RES]  66.8,89.92 0 top
R314  10K  [0603-RES]  66.8,95 0 top
R315  10K  [0603-RES]  56.64,89.92 0 top
R316  10K  [0603-RES]  56.64,95 180 top
R317  10K  [0603-RES]  60.45,94.11 90 top
R318  20K  [0603-RES]  60.45,90.81 90 top
R319  10K  [0603-RES]  62.99,94.11 90 top
R320  20K  [0603-RES]  62.99,90.81 90 top
R321  10K  [0603-RES]  82.55,89.92 0 top
R322  10K  [0603-RES]  82.55,95 0 top
R323  10K  [0603-RES]  72.39,89.92 0 top
R324  10K  [0603-RES]  72.39,95 180 top
R325  10K  [0603-RES]  76.2,94.11 90 top
R326  20K  [0603-RES]  76.2,90.81 90 top
R327  10K  [0603-RES]  78.74,94.11 90 top
R328  20K  [0603-RES]  78.74,90.81 90 top
R329  10K  [0603-RES]  98.3,89.92 0 top
R330  10K  [0603-RES]  98.3,95 0 top
R331  10K  [0603-RES]  88.14,89.92 0 top
R332  10K  [0603-RES]  88.14,95 180 top
R333  10K  [0603-RES]  91.95,94.11 90 top
R334  20K  [0603-RES]  91.95,90.81 90 top
R335  10K  [0603-RES]  94.49,94.11 90 top
R336  20K  [0603-RES]  94.49,90.81 90 top
U$1  LOGO-SFESK  [SFE-LOGO-FLAME]  13.59,13.97 0 bottom
U$2  OSHW-LOGOS  [OSHW-LOGO-S]  8.64,15.24 0 bottom
U$3  LOGO-SFESK  [SFE-LOGO-FLAME]  29.34,13.97 0 bottom
U$4  OSHW-LOGOS  [OSHW-LOGO-S]  24.38,15.24 0 bottom
U$5  LOGO-SFESK  [SFE-LOGO-FLAME]  45.09,13.97 0 bottom
U$6  OSHW-LOGOS  [OSHW-LOGO-S]  40.13,15.24 0 bottom
U$7  LOGO-SFESK  [SFE-LOGO-FLAME]  60.83,13.97 0 bottom
U$8  OSHW-LOGOS  [OSHW-LOGO-S]  55.88,15.24 0 bottom
U$9  LOGO-SFESK  [SFE-LOGO-FLAME]  76.58,13.97 0 bottom
U$10  OSHW-LOGOS  [OSHW-LOGO-S]  71.63,15.24 0 bottom
U$11  LOGO-SFESK  [SFE-LOGO-FLAME]  92.33,13.97 0 bottom
U$12  OSHW-LOGOS  [OSHW-LOGO-S]  87.38,15.24 0 bottom
U$13  LOGO-SFESK  [SFE-LOGO-FLAME]  13.59,27.18 0 bottom
U$14  OSHW-LOGOS  [OSHW-LOGO-S]  8.64,28.45 0 bottom
U$15  LOGO-SFESK  [SFE-LOGO-FLAME]  29.34,27.18 0 bottom
U$16  OSHW-LOGOS  [OSHW-LOGO-S]  24.38,28.45 0 bottom
U$17  LOGO-SFESK  [SFE-LOGO-FLAME]  45.09,27.18 0 bottom
U$18  OSHW-LOGOS  [OSHW-LOGO-S]  40.13,28.45 0 bottom
U$19  LOGO-SFESK  [SFE-LOGO-FLAME]  60.83,27.18 0 bottom
U$20  OSHW-LOGOS  [OSHW-LOGO-S]  55.88,28.45 0 bottom
U$21  LOGO-SFESK  [SFE-LOGO-FLAME]  76.58,27.18 0 bottom
U$22  OSHW-LOGOS  [OSHW-LOGO-S]  71.63,28.45 0 bottom
U$23  LOGO-SFESK  [SFE-LOGO-FLAME]  92.33,27.18 0 bottom
U$24  OSHW-LOGOS  [OSHW-LOGO-S]  87.38,28.45 0 bottom
U$25  LOGO-SFESK  [SFE-LOGO-FLAME]  13.59,40.39 0 bottom
U$26  OSHW-LOGOS  [OSHW-LOGO-S]  8.64,41.66 0 bottom
U$27  LOGO-SFESK  [SFE-LOGO-FLAME]  29.34,40.39 0 bottom
U$28  OSHW-LOGOS  [OSHW-LOGO-S]  24.38,41.66 0 bottom
U$29  LOGO-SFESK  [SFE-LOGO-FLAME]  45.09,40.39 0 bottom
U$30  OSHW-LOGOS  [OSHW-LOGO-S]  40.13,41.66 0 bottom
U$31  LOGO-SFESK  [SFE-LOGO-FLAME]  60.83,40.39 0 bottom
U$32  OSHW-LOGOS  [OSHW-LOGO-S]  55.88,41.66 0 bottom
U$33  LOGO-SFESK  [SFE-LOGO-FLAME]  76.58,40.39 0 bottom
U$34  OSHW-LOGOS  [OSHW-LOGO-S]  71.63,41.66 0 bottom
U$35  LOGO-SFESK  [SFE-LOGO-FLAME]  92.33,40.39 0 bottom
U$36  OSHW-LOGOS  [OSHW-LOGO-S]  87.38,41.66 0 bottom
U$37  LOGO-SFESK  [SFE-LOGO-FLAME]  13.59,53.59 0 bottom
U$38  OSHW-LOGOS  [OSHW-LOGO-S]  8.64,54.86 0 bottom
U$39  LOGO-SFESK  [SFE-LOGO-FLAME]  29.34,53.59 0 bottom
U$40  OSHW-LOGOS  [OSHW-LOGO-S]  24.38,54.86 0 bottom
U$41  LOGO-SFESK  [SFE-LOGO-FLAME]  45.09,53.59 0 bottom
U$42  OSHW-LOGOS  [OSHW-LOGO-S]  40.13,54.86 0 bottom
U$43  LOGO-SFESK  [SFE-LOGO-FLAME]  60.83,53.59 0 bottom
U$44  OSHW-LOGOS  [OSHW-LOGO-S]  55.88,54.86 0 bottom
U$45  LOGO-SFESK  [SFE-LOGO-FLAME]  76.58,53.59 0 bottom
U$46  OSHW-LOGOS  [OSHW-LOGO-S]  71.63,54.86 0 bottom
U$47  LOGO-SFESK  [SFE-LOGO-FLAME]  92.33,53.59 0 bottom
U$48  OSHW-LOGOS  [OSHW-LOGO-S]  87.38,54.86 0 bottom
U$49  LOGO-SFESK  [SFE-LOGO-FLAME]  13.59,66.8 0 bottom
U$50  OSHW-LOGOS  [OSHW-LOGO-S]  8.64,68.07 0 bottom
U$51  LOGO-SFESK  [SFE-LOGO-FLAME]  29.34,66.8 0 bottom
U$52  OSHW-LOGOS  [OSHW-LOGO-S]  24.38,68.07 0 bottom
U$53  LOGO-SFESK  [SFE-LOGO-FLAME]  45.09,66.8 0 bottom
U$54  OSHW-LOGOS  [OSHW-LOGO-S]  40.13,68.07 0 bottom
U$55  LOGO-SFESK  [SFE-LOGO-FLAME]  60.83,66.8 0 bottom
U$56  OSHW-LOGOS  [OSHW-LOGO-S]  55.88,68.07 0 bottom
U$57  LOGO-SFESK  [SFE-LOGO-FLAME]  76.58,66.8 0 bottom
U$58  OSHW-LOGOS  [OSHW-LOGO-S]  71.63,68.07 0 bottom
U$59  LOGO-SFESK  [SFE-LOGO-FLAME]  92.33,66.8 0 bottom
U$60  OSHW-LOGOS  [OSHW-LOGO-S]  87.38,68.07 0 bottom
U$61  LOGO-SFESK  [SFE-LOGO-FLAME]  13.59,80.01 0 bottom
U$62  OSHW-LOGOS  [OSHW-LOGO-S]  8.64,81.28 0 bottom
U$63  LOGO-SFESK  [SFE-LOGO-FLAME]  29.34,80.01 0 bottom
U$64  OSHW-LOGOS  [OSHW-LOGO-S]  24.38,81.28 0 bottom
U$65  LOGO-SFESK  [SFE-LOGO-FLAME]  45.09,80.01 0 bottom
U$66  OSHW-LOGOS  [OSHW-LOGO-S]  40.13,81.28 0 bottom
U$67  LOGO-SFESK  [SFE-LOGO-FLAME]  60.83,80.01 0 bottom
U$68  OSHW-LOGOS  [OSHW-LOGO-S]  55.88,81.28 0 bottom
U$69  LOGO-SFESK  [SFE-LOGO-FLAME]  76.58,80.01 0 bottom
U$70  OSHW-LOGOS  [OSHW-LOGO-S]  71.63,81.28 0 bottom
U$71  LOGO-SFESK  [SFE-LOGO-FLAME]  92.33,80.01 0 bottom
U$72  OSHW-LOGOS  [OSHW-LOGO-S]  87.38,81.28 0 bottom
U$73  LOGO-SFESK  [SFE-LOGO-FLAME]  13.59,93.22 0 bottom
U$74  OSHW-LOGOS  [OSHW-LOGO-S]  8.64,94.49 0 bottom
U$75  LOGO-SFESK  [SFE-LOGO-FLAME]  29.34,93.22 0 bottom
U$76  OSHW-LOGOS  [OSHW-LOGO-S]  24.38,94.49 0 bottom
U$77  LOGO-SFESK  [SFE-LOGO-FLAME]  45.09,93.22 0 bottom
U$78  OSHW-LOGOS  [OSHW-LOGO-S]  40.13,94.49 0 bottom
U$79  LOGO-SFESK  [SFE-LOGO-FLAME]  60.83,93.22 0 bottom
U$80  OSHW-LOGOS  [OSHW-LOGO-S]  55.88,94.49 0 bottom
U$81  LOGO-SFESK  [SFE-LOGO-FLAME]  76.58,93.22 0 bottom
U$82  OSHW-LOGOS  [OSHW-LOGO-S]  71.63,94.49 0 bottom
U$83  LOGO-SFESK  [SFE-LOGO-FLAME]  92.33,93.22 0 bottom
U$84  OSHW-LOGOS  [OSHW-LOGO-S]  87.38,94.49 0 bottom

## Library data of the parts
E$1 E$4 E$5 JP5 JP10 JP15 JP20 JP25 JP30 JP35 JP40 JP45 JP50 JP55 JP60 JP65 JP70 JP75 JP80 JP85 JP90 JP95 JP100 JP105 JP110 JP115 JP120 JP125 JP130 JP135 JP140 JP145 JP150 JP155 JP160 JP165 JP170 JP175 JP180 JP185 JP190 JP195 JP200 JP205 JP210 U$2 U$4 U$6 U$8 U$10 U$12 U$14 U$16 U$18 U$20 U$22 U$24 U$26 U$28 U$30 U$32 U$34 U$36 U$38 U$40 U$42 U$44 U$46 U$48 U$50 U$52 U$54 U$56 U$58 U$60 U$62 U$64 U$66 U$68 U$70 U$72 U$74 U$76 U$78 U$80 U$82 U$84 = SparkFun-Aesthetics
JP1-JP4 JP6-JP9 JP11-JP14 JP16-JP19 JP21-JP24 JP26-JP29 JP31-JP34 JP36-JP39 JP41-JP44 JP46-JP49 JP51-JP54 JP56-JP59 JP61-JP64 JP66-JP69 JP71-JP74 JP76-JP79 JP81-JP84 JP86-JP89 JP91-JP94 JP96-JP99 JP101-JP104 JP106-JP109 JP111-JP114 JP116-JP119 JP121-JP124 JP126-JP129 JP131-JP134 JP136-JP139 JP141-JP144 JP146-JP149 JP151-JP154 JP156-JP159 JP161-JP164 JP166-JP169 JP171-JP174 JP176-JP179 JP181-JP184 JP186-JP189 JP191-JP194 JP196-JP199 JP201-JP204 JP206-JP209 Q1-Q84 R1-R336 U$1 U$3 U$5 U$7 U$9 U$11 U$13 U$15 U$17 U$19 U$21 U$23 U$25 U$27 U$29 U$31 U$33 U$35 U$37 U$39 U$41 U$43 U$45 U$47 U$49 U$51 U$53 U$55 U$57 U$59 U$61 U$63 U$65 U$67 U$69 U$71 U$73 U$75 U$77 U$79 U$81 U$83 = SparkFun

## Nets
GND: JP1.3 JP2.4 R5.1 R9.1
GND1: JP6.3 JP7.4 R14.1 R16.1
GND2: JP11.3 JP12.4 R22.1 R24.1
GND3: JP16.3 JP17.4 R30.1 R32.1
GND4: JP21.3 JP22.4 R38.1 R40.1
GND5: JP26.3 JP27.4 R46.1 R48.1
GND6: JP31.3 JP32.4 R54.1 R56.1
GND7: JP36.3 JP37.4 R62.1 R64.1
GND8: JP41.3 JP42.4 R70.1 R72.1
GND9: JP46.3 JP47.4 R78.1 R80.1
GND10: JP51.3 JP52.4 R86.1 R88.1
GND11: JP56.3 JP57.4 R94.1 R96.1
GND12: JP61.3 JP62.4 R102.1 R104.1
GND13: JP66.3 JP67.4 R110.1 R112.1
GND14: JP71.3 JP72.4 R118.1 R120.1
GND15: JP76.3 JP77.4 R126.1 R128.1
GND16: JP81.3 JP82.4 R134.1 R136.1
GND17: JP86.3 JP87.4 R142.1 R144.1
GND18: JP91.3 JP92.4 R150.1 R152.1
GND19: JP96.3 JP97.4 R158.1 R160.1
GND20: JP101.3 JP102.4 R166.1 R168.1
GND21: JP106.3 JP107.4 R174.1 R176.1
GND22: JP111.3 JP112.4 R182.1 R184.1
GND23: JP116.3 JP117.4 R190.1 R192.1
GND24: JP121.3 JP122.4 R198.1 R200.1
GND25: JP126.3 JP127.4 R206.1 R208.1
GND26: JP131.3 JP132.4 R214.1 R216.1
GND27: JP136.3 JP137.4 R222.1 R224.1
GND28: JP141.3 JP142.4 R230.1 R232.1
GND29: JP146.3 JP147.4 R238.1 R240.1
GND30: JP151.3 JP152.4 R246.1 R248.1
GND31: JP156.3 JP157.4 R254.1 R256.1
GND32: JP161.3 JP162.4 R262.1 R264.1
GND33: JP166.3 JP167.4 R270.1 R272.1
GND34: JP171.3 JP172.4 R278.1 R280.1
GND35: JP176.3 JP177.4 R286.1 R288.1
GND36: JP181.3 JP182.4 R294.1 R296.1
GND37: JP186.3 JP187.4 R302.1 R304.1
GND38: JP191.3 JP192.4 R310.1 R312.1
GND39: JP196.3 JP197.4 R318.1 R320.1
GND40: JP201.3 JP202.4 R326.1 R328.1
GND41: JP206.3 JP207.4 R334.1 R336.1
HV: JP2.3 R4.1 R7.1
HV1: JP7.3 R10.1 R12.1
HV2: JP12.3 R18.1 R20.1
HV3: JP17.3 R26.1 R28.1
HV4: JP22.3 R34.1 R36.1
HV5: JP27.3 R42.1 R44.1
HV6: JP32.3 R50.1 R52.1
HV7: JP37.3 R58.1 R60.1
HV8: JP42.3 R66.1 R68.1
HV9: JP47.3 R74.1 R76.1
HV10: JP52.3 R82.1 R84.1
HV11: JP57.3 R90.1 R92.1
HV12: JP62.3 R98.1 R100.1
HV13: JP67.3 R106.1 R108.1
HV14: JP72.3 R114.1 R116.1
HV15: JP77.3 R122.1 R124.1
HV16: JP82.3 R130.1 R132.1
HV17: JP87.3 R138.1 R140.1
HV18: JP92.3 R146.1 R148.1
HV19: JP97.3 R154.1 R156.1
HV20: JP102.3 R162.1 R164.1
HV21: JP107.3 R170.1 R172.1
HV22: JP112.3 R178.1 R180.1
HV23: JP117.3 R186.1 R188.1
HV24: JP122.3 R194.1 R196.1
HV25: JP127.3 R202.1 R204.1
HV26: JP132.3 R210.1 R212.1
HV27: JP137.3 R218.1 R220.1
HV28: JP142.3 R226.1 R228.1
HV29: JP147.3 R234.1 R236.1
HV30: JP152.3 R242.1 R244.1
HV31: JP157.3 R250.1 R252.1
HV32: JP162.3 R258.1 R260.1
HV33: JP167.3 R266.1 R268.1
HV34: JP172.3 R274.1 R276.1
HV35: JP177.3 R282.1 R284.1
HV36: JP182.3 R290.1 R292.1
HV37: JP187.3 R298.1 R300.1
HV38: JP192.3 R306.1 R308.1
HV39: JP197.3 R314.1 R316.1
HV40: JP202.3 R322.1 R324.1
HV41: JP207.3 R330.1 R332.1
LV: JP1.4 Q1.1 Q2.1 R3.1 R6.1
LV1: JP6.4 Q3.1 Q4.1 R2.1 R11.1
LV2: JP11.4 Q5.1 Q6.1 R17.1 R19.1
LV3: JP16.4 Q7.1 Q8.1 R25.1 R27.1
LV4: JP21.4 Q9.1 Q10.1 R33.1 R35.1
LV5: JP26.4 Q11.1 Q12.1 R41.1 R43.1
LV6: JP31.4 Q13.1 Q14.1 R49.1 R51.1
LV7: JP36.4 Q15.1 Q16.1 R57.1 R59.1
LV8: JP41.4 Q17.1 Q18.1 R65.1 R67.1
LV9: JP46.4 Q19.1 Q20.1 R73.1 R75.1
LV10: JP51.4 Q21.1 Q22.1 R81.1 R83.1
LV11: JP56.4 Q23.1 Q24.1 R89.1 R91.1
LV12: JP61.4 Q25.1 Q26.1 R97.1 R99.1
LV13: JP66.4 Q27.1 Q28.1 R105.1 R107.1
LV14: JP71.4 Q29.1 Q30.1 R113.1 R115.1
LV15: JP76.4 Q31.1 Q32.1 R121.1 R123.1
LV16: JP81.4 Q33.1 Q34.1 R129.1 R131.1
LV17: JP86.4 Q35.1 Q36.1 R137.1 R139.1
LV18: JP91.4 Q37.1 Q38.1 R145.1 R147.1
LV19: JP96.4 Q39.1 Q40.1 R153.1 R155.1
LV20: JP101.4 Q41.1 Q42.1 R161.1 R163.1
LV21: JP106.4 Q43.1 Q44.1 R169.1 R171.1
LV22: JP111.4 Q45.1 Q46.1 R177.1 R179.1
LV23: JP116.4 Q47.1 Q48.1 R185.1 R187.1
LV24: JP121.4 Q49.1 Q50.1 R193.1 R195.1
LV25: JP126.4 Q51.1 Q52.1 R201.1 R203.1
LV26: JP131.4 Q53.1 Q54.1 R209.1 R211.1
LV27: JP136.4 Q55.1 Q56.1 R217.1 R219.1
LV28: JP141.4 Q57.1 Q58.1 R225.1 R227.1
LV29: JP146.4 Q59.1 Q60.1 R233.1 R235.1
LV30: JP151.4 Q61.1 Q62.1 R241.1 R243.1
LV31: JP156.4 Q63.1 Q64.1 R249.1 R251.1
LV32: JP161.4 Q65.1 Q66.1 R257.1 R259.1
LV33: JP166.4 Q67.1 Q68.1 R265.1 R267.1
LV34: JP171.4 Q69.1 Q70.1 R273.1 R275.1
LV35: JP176.4 Q71.1 Q72.1 R281.1 R283.1
LV36: JP181.4 Q73.1 Q74.1 R289.1 R291.1
LV37: JP186.4 Q75.1 Q76.1 R297.1 R299.1
LV38: JP191.4 Q77.1 Q78.1 R305.1 R307.1
LV39: JP196.4 Q79.1 Q80.1 R313.1 R315.1
LV40: JP201.4 Q81.1 Q82.1 R321.1 R323.1
LV41: JP206.4 Q83.1 Q84.1 R329.1 R331.1
RX2_HV: JP2.5 R8.2
RX2_HV1: JP7.5 R15.2
RX2_HV2: JP12.5 R23.2
RX2_HV3: JP17.5 R31.2
RX2_HV4: JP22.5 R39.2
RX2_HV5: JP27.5 R47.2
RX2_HV6: JP32.5 R55.2
RX2_HV7: JP37.5 R63.2
RX2_HV8: JP42.5 R71.2
RX2_HV9: JP47.5 R79.2
RX2_HV10: JP52.5 R87.2
RX2_HV11: JP57.5 R95.2
RX2_HV12: JP62.5 R103.2
RX2_HV13: JP67.5 R111.2
RX2_HV14: JP72.5 R119.2
RX2_HV15: JP77.5 R127.2
RX2_HV16: JP82.5 R135.2
RX2_HV17: JP87.5 R143.2
RX2_HV18: JP92.5 R151.2
RX2_HV19: JP97.5 R159.2
RX2_HV20: JP102.5 R167.2
RX2_HV21: JP107.5 R175.2
RX2_HV22: JP112.5 R183.2
RX2_HV23: JP117.5 R191.2
RX2_HV24: JP122.5 R199.2
RX2_HV25: JP127.5 R207.2
RX2_HV26: JP132.5 R215.2
RX2_HV27: JP137.5 R223.2
RX2_HV28: JP142.5 R231.2
RX2_HV29: JP147.5 R239.2
RX2_HV30: JP152.5 R247.2
RX2_HV31: JP157.5 R255.2
RX2_HV32: JP162.5 R263.2
RX2_HV33: JP167.5 R271.2
RX2_HV34: JP172.5 R279.2
RX2_HV35: JP177.5 R287.2
RX2_HV36: JP182.5 R295.2
RX2_HV37: JP187.5 R303.2
RX2_HV38: JP192.5 R311.2
RX2_HV39: JP197.5 R319.2
RX2_HV40: JP202.5 R327.2
RX2_HV41: JP207.5 R335.2
RX2_LV: JP1.2 R8.1 R9.2
RX2_LV1: JP6.2 R15.1 R16.2
RX2_LV2: JP11.2 R23.1 R24.2
RX2_LV3: JP16.2 R31.1 R32.2
RX2_LV4: JP21.2 R39.1 R40.2
RX2_LV5: JP26.2 R47.1 R48.2
RX2_LV6: JP31.2 R55.1 R56.2
RX2_LV7: JP36.2 R63.1 R64.2
RX2_LV8: JP41.2 R71.1 R72.2
RX2_LV9: JP46.2 R79.1 R80.2
RX2_LV10: JP51.2 R87.1 R88.2
RX2_LV11: JP56.2 R95.1 R96.2
RX2_LV12: JP61.2 R103.1 R104.2
RX2_LV13: JP66.2 R111.1 R112.2
RX2_LV14: JP71.2 R119.1 R120.2
RX2_LV15: JP76.2 R127.1 R128.2
RX2_LV16: JP81.2 R135.1 R136.2
RX2_LV17: JP86.2 R143.1 R144.2
RX2_LV18: JP91.2 R151.1 R152.2
RX2_LV19: JP96.2 R159.1 R160.2
RX2_LV20: JP101.2 R167.1 R168.2
RX2_LV21: JP106.2 R175.1 R176.2
RX2_LV22: JP111.2 R183.1 R184.2
RX2_LV23: JP116.2 R191.1 R192.2
RX2_LV24: JP121.2 R199.1 R200.2
RX2_LV25: JP126.2 R207.1 R208.2
RX2_LV26: JP131.2 R215.1 R216.2
RX2_LV27: JP136.2 R223.1 R224.2
RX2_LV28: JP141.2 R231.1 R232.2
RX2_LV29: JP146.2 R239.1 R240.2
RX2_LV30: JP151.2 R247.1 R248.2
RX2_LV31: JP156.2 R255.1 R256.2
RX2_LV32: JP161.2 R263.1 R264.2
RX2_LV33: JP166.2 R271.1 R272.2
RX2_LV34: JP171.2 R279.1 R280.2
RX2_LV35: JP176.2 R287.1 R288.2
RX2_LV36: JP181.2 R295.1 R296.2
RX2_LV37: JP186.2 R303.1 R304.2
RX2_LV38: JP191.2 R311.1 R312.2
RX2_LV39: JP196.2 R319.1 R320.2
RX2_LV40: JP201.2 R327.1 R328.2
RX2_LV41: JP206.2 R335.1 R336.2
RX_HV: JP2.2 R1.2
RX_HV1: JP7.2 R13.2
RX_HV2: JP12.2 R21.2
RX_HV3: JP17.2 R29.2
RX_HV4: JP22.2 R37.2
RX_HV5: JP27.2 R45.2
RX_HV6: JP32.2 R53.2
RX_HV7: JP37.2 R61.2
RX_HV8: JP42.2 R69.2
RX_HV9: JP47.2 R77.2
RX_HV10: JP52.2 R85.2
RX_HV11: JP57.2 R93.2
RX_HV12: JP62.2 R101.2
RX_HV13: JP67.2 R109.2
RX_HV14: JP72.2 R117.2
RX_HV15: JP77.2 R125.2
RX_HV16: JP82.2 R133.2
RX_HV17: JP87.2 R141.2
RX_HV18: JP92.2 R149.2
RX_HV19: JP97.2 R157.2
RX_HV20: JP102.2 R165.2
RX_HV21: JP107.2 R173.2
RX_HV22: JP112.2 R181.2
RX_HV23: JP117.2 R189.2
RX_HV24: JP122.2 R197.2
RX_HV25: JP127.2 R205.2
RX_HV26: JP132.2 R213.2
RX_HV27: JP137.2 R221.2
RX_HV28: JP142.2 R229.2
RX_HV29: JP147.2 R237.2
RX_HV30: JP152.2 R245.2
RX_HV31: JP157.2 R253.2
RX_HV32: JP162.2 R261.2
RX_HV33: JP167.2 R269.2
RX_HV34: JP172.2 R277.2
RX_HV35: JP177.2 R285.2
RX_HV36: JP182.2 R293.2
RX_HV37: JP187.2 R301.2
RX_HV38: JP192.2 R309.2
RX_HV39: JP197.2 R317.2
RX_HV40: JP202.2 R325.2
RX_HV41: JP207.2 R333.2
RX_LV: JP1.5 R1.1 R5.2
RX_LV1: JP6.5 R13.1 R14.2
RX_LV2: JP11.5 R21.1 R22.2
RX_LV3: JP16.5 R29.1 R30.2
RX_LV4: JP21.5 R37.1 R38.2
RX_LV5: JP26.5 R45.1 R46.2
RX_LV6: JP31.5 R53.1 R54.2
RX_LV7: JP36.5 R61.1 R62.2
RX_LV8: JP41.5 R69.1 R70.2
RX_LV9: JP46.5 R77.1 R78.2
RX_LV10: JP51.5 R85.1 R86.2
RX_LV11: JP56.5 R93.1 R94.2
RX_LV12: JP61.5 R101.1 R102.2
RX_LV13: JP66.5 R109.1 R110.2
RX_LV14: JP71.5 R117.1 R118.2
RX_LV15: JP76.5 R125.1 R126.2
RX_LV16: JP81.5 R133.1 R134.2
RX_LV17: JP86.5 R141.1 R142.2
RX_LV18: JP91.5 R149.1 R150.2
RX_LV19: JP96.5 R157.1 R158.2
RX_LV20: JP101.5 R165.1 R166.2
RX_LV21: JP106.5 R173.1 R174.2
RX_LV22: JP111.5 R181.1 R182.2
RX_LV23: JP116.5 R189.1 R190.2
RX_LV24: JP121.5 R197.1 R198.2
RX_LV25: JP126.5 R205.1 R206.2
RX_LV26: JP131.5 R213.1 R214.2
RX_LV27: JP136.5 R221.1 R222.2
RX_LV28: JP141.5 R229.1 R230.2
RX_LV29: JP146.5 R237.1 R238.2
RX_LV30: JP151.5 R245.1 R246.2
RX_LV31: JP156.5 R253.1 R254.2
RX_LV32: JP161.5 R261.1 R262.2
RX_LV33: JP166.5 R269.1 R270.2
RX_LV34: JP171.5 R277.1 R278.2
RX_LV35: JP176.5 R285.1 R286.2
RX_LV36: JP181.5 R293.1 R294.2
RX_LV37: JP186.5 R301.1 R302.2
RX_LV38: JP191.5 R309.1 R310.2
RX_LV39: JP196.5 R317.1 R318.2
RX_LV40: JP201.5 R325.1 R326.2
RX_LV41: JP206.5 R333.1 R334.2
TX2_HV: JP2.6 Q2.3 R7.2
TX2_HV1: JP7.6 Q3.3 R10.2
TX2_HV2: JP12.6 Q5.3 R18.2
TX2_HV3: JP17.6 Q7.3 R26.2
TX2_HV4: JP22.6 Q9.3 R34.2
TX2_HV5: JP27.6 Q11.3 R42.2
TX2_HV6: JP32.6 Q13.3 R50.2
TX2_HV7: JP37.6 Q15.3 R58.2
TX2_HV8: JP42.6 Q17.3 R66.2
TX2_HV9: JP47.6 Q19.3 R74.2
TX2_HV10: JP52.6 Q21.3 R82.2
TX2_HV11: JP57.6 Q23.3 R90.2
TX2_HV12: JP62.6 Q25.3 R98.2
TX2_HV13: JP67.6 Q27.3 R106.2
TX2_HV14: JP72.6 Q29.3 R114.2
TX2_HV15: JP77.6 Q31.3 R122.2
TX2_HV16: JP82.6 Q33.3 R130.2
TX2_HV17: JP87.6 Q35.3 R138.2
TX2_HV18: JP92.6 Q37.3 R146.2
TX2_HV19: JP97.6 Q39.3 R154.2
TX2_HV20: JP102.6 Q41.3 R162.2
TX2_HV21: JP107.6 Q43.3 R170.2
TX2_HV22: JP112.6 Q45.3 R178.2
TX2_HV23: JP117.6 Q47.3 R186.2
TX2_HV24: JP122.6 Q49.3 R194.2
TX2_HV25: JP127.6 Q51.3 R202.2
TX2_HV26: JP132.6 Q53.3 R210.2
TX2_HV27: JP137.6 Q55.3 R218.2
TX2_HV28: JP142.6 Q57.3 R226.2
TX2_HV29: JP147.6 Q59.3 R234.2
TX2_HV30: JP152.6 Q61.3 R242.2
TX2_HV31: JP157.6 Q63.3 R250.2
TX2_HV32: JP162.6 Q65.3 R258.2
TX2_HV33: JP167.6 Q67.3 R266.2
TX2_HV34: JP172.6 Q69.3 R274.2
TX2_HV35: JP177.6 Q71.3 R282.2
TX2_HV36: JP182.6 Q73.3 R290.2
TX2_HV37: JP187.6 Q75.3 R298.2
TX2_HV38: JP192.6 Q77.3 R306.2
TX2_HV39: JP197.6 Q79.3 R314.2
TX2_HV40: JP202.6 Q81.3 R322.2
TX2_HV41: JP207.6 Q83.3 R330.2
TX2_LV: JP1.1 Q2.2 R6.2
TX2_LV1: JP6.1 Q3.2 R2.2
TX2_LV2: JP11.1 Q5.2 R17.2
TX2_LV3: JP16.1 Q7.2 R25.2
TX2_LV4: JP21.1 Q9.2 R33.2
TX2_LV5: JP26.1 Q11.2 R41.2
TX2_LV6: JP31.1 Q13.2 R49.2
TX2_LV7: JP36.1 Q15.2 R57.2
TX2_LV8: JP41.1 Q17.2 R65.2
TX2_LV9: JP46.1 Q19.2 R73.2
TX2_LV10: JP51.1 Q21.2 R81.2
TX2_LV11: JP56.1 Q23.2 R89.2
TX2_LV12: JP61.1 Q25.2 R97.2
TX2_LV13: JP66.1 Q27.2 R105.2
TX2_LV14: JP71.1 Q29.2 R113.2
TX2_LV15: JP76.1 Q31.2 R121.2
TX2_LV16: JP81.1 Q33.2 R129.2
TX2_LV17: JP86.1 Q35.2 R137.2
TX2_LV18: JP91.1 Q37.2 R145.2
TX2_LV19: JP96.1 Q39.2 R153.2
TX2_LV20: JP101.1 Q41.2 R161.2
TX2_LV21: JP106.1 Q43.2 R169.2
TX2_LV22: JP111.1 Q45.2 R177.2
TX2_LV23: JP116.1 Q47.2 R185.2
TX2_LV24: JP121.1 Q49.2 R193.2
TX2_LV25: JP126.1 Q51.2 R201.2
TX2_LV26: JP131.1 Q53.2 R209.2
TX2_LV27: JP136.1 Q55.2 R217.2
TX2_LV28: JP141.1 Q57.2 R225.2
TX2_LV29: JP146.1 Q59.2 R233.2
TX2_LV30: JP151.1 Q61.2 R241.2
TX2_LV31: JP156.1 Q63.2 R249.2
TX2_LV32: JP161.1 Q65.2 R257.2
TX2_LV33: JP166.1 Q67.2 R265.2
TX2_LV34: JP171.1 Q69.2 R273.2
TX2_LV35: JP176.1 Q71.2 R281.2
TX2_LV36: JP181.1 Q73.2 R289.2
TX2_LV37: JP186.1 Q75.2 R297.2
TX2_LV38: JP191.1 Q77.2 R305.2
TX2_LV39: JP196.1 Q79.2 R313.2
TX2_LV40: JP201.1 Q81.2 R321.2
TX2_LV41: JP206.1 Q83.2 R329.2
TX_HV: JP2.1 Q1.3 R4.2
TX_HV1: JP7.1 Q4.3 R12.2
TX_HV2: JP12.1 Q6.3 R20.2
TX_HV3: JP17.1 Q8.3 R28.2
TX_HV4: JP22.1 Q10.3 R36.2
TX_HV5: JP27.1 Q12.3 R44.2
TX_HV6: JP32.1 Q14.3 R52.2
TX_HV7: JP37.1 Q16.3 R60.2
TX_HV8: JP42.1 Q18.3 R68.2
TX_HV9: JP47.1 Q20.3 R76.2
TX_HV10: JP52.1 Q22.3 R84.2
TX_HV11: JP57.1 Q24.3 R92.2
TX_HV12: JP62.1 Q26.3 R100.2
TX_HV13: JP67.1 Q28.3 R108.2
TX_HV14: JP72.1 Q30.3 R116.2
TX_HV15: JP77.1 Q32.3 R124.2
TX_HV16: JP82.1 Q34.3 R132.2
TX_HV17: JP87.1 Q36.3 R140.2
TX_HV18: JP92.1 Q38.3 R148.2
TX_HV19: JP97.1 Q40.3 R156.2
TX_HV20: JP102.1 Q42.3 R164.2
TX_HV21: JP107.1 Q44.3 R172.2
TX_HV22: JP112.1 Q46.3 R180.2
TX_HV23: JP117.1 Q48.3 R188.2
TX_HV24: JP122.1 Q50.3 R196.2
TX_HV25: JP127.1 Q52.3 R204.2
TX_HV26: JP132.1 Q54.3 R212.2
TX_HV27: JP137.1 Q56.3 R220.2
TX_HV28: JP142.1 Q58.3 R228.2
TX_HV29: JP147.1 Q60.3 R236.2
TX_HV30: JP152.1 Q62.3 R244.2
TX_HV31: JP157.1 Q64.3 R252.2
TX_HV32: JP162.1 Q66.3 R260.2
TX_HV33: JP167.1 Q68.3 R268.2
TX_HV34: JP172.1 Q70.3 R276.2
TX_HV35: JP177.1 Q72.3 R284.2
TX_HV36: JP182.1 Q74.3 R292.2
TX_HV37: JP187.1 Q76.3 R300.2
TX_HV38: JP192.1 Q78.3 R308.2
TX_HV39: JP197.1 Q80.3 R316.2
TX_HV40: JP202.1 Q82.3 R324.2
TX_HV41: JP207.1 Q84.3 R332.2
TX_LV: JP1.6 Q1.2 R3.2
TX_LV1: JP6.6 Q4.2 R11.2
TX_LV2: JP11.6 Q6.2 R19.2
TX_LV3: JP16.6 Q8.2 R27.2
TX_LV4: JP21.6 Q10.2 R35.2
TX_LV5: JP26.6 Q12.2 R43.2
TX_LV6: JP31.6 Q14.2 R51.2
TX_LV7: JP36.6 Q16.2 R59.2
TX_LV8: JP41.6 Q18.2 R67.2
TX_LV9: JP46.6 Q20.2 R75.2
TX_LV10: JP51.6 Q22.2 R83.2
TX_LV11: JP56.6 Q24.2 R91.2
TX_LV12: JP61.6 Q26.2 R99.2
TX_LV13: JP66.6 Q28.2 R107.2
TX_LV14: JP71.6 Q30.2 R115.2
TX_LV15: JP76.6 Q32.2 R123.2
TX_LV16: JP81.6 Q34.2 R131.2
TX_LV17: JP86.6 Q36.2 R139.2
TX_LV18: JP91.6 Q38.2 R147.2
TX_LV19: JP96.6 Q40.2 R155.2
TX_LV20: JP101.6 Q42.2 R163.2
TX_LV21: JP106.6 Q44.2 R171.2
TX_LV22: JP111.6 Q46.2 R179.2
TX_LV23: JP116.6 Q48.2 R187.2
TX_LV24: JP121.6 Q50.2 R195.2
TX_LV25: JP126.6 Q52.2 R203.2
TX_LV26: JP131.6 Q54.2 R211.2
TX_LV27: JP136.6 Q56.2 R219.2
TX_LV28: JP141.6 Q58.2 R227.2
TX_LV29: JP146.6 Q60.2 R235.2
TX_LV30: JP151.6 Q62.2 R243.2
TX_LV31: JP156.6 Q64.2 R251.2
TX_LV32: JP161.6 Q66.2 R259.2
TX_LV33: JP166.6 Q68.2 R267.2
TX_LV34: JP171.6 Q70.2 R275.2
TX_LV35: JP176.6 Q72.2 R283.2
TX_LV36: JP181.6 Q74.2 R291.2
TX_LV37: JP186.6 Q76.2 R299.2
TX_LV38: JP191.6 Q78.2 R307.2
TX_LV39: JP196.6 Q80.2 R315.2
TX_LV40: JP201.6 Q82.2 R323.2
TX_LV41: JP206.6 Q84.2 R331.2

## Tracks (layer width: path | path; a pad name or v marks a point on that pad's centre or on a via)
GND
  Top 0.305: JP1.3 R9.1 14.48,10.71 | JP2.4 14.48,17.02 14.48,10.71 | R5.1 14.48,10.71
GND1
  Top 0.305: JP6.3 R16.1 30.23,10.71 | JP7.4 30.23,17.02 30.23,10.71 | R14.1 30.23,10.71
GND2
  Top 0.305: JP11.3 R24.1 45.97,10.71 | JP12.4 45.97,17.02 45.97,10.71 | R22.1 45.97,10.71
GND3
  Top 0.305: JP16.3 R32.1 61.72,10.71 | JP17.4 61.72,17.02 61.72,10.71 | R30.1 61.72,10.71
GND4
  Top 0.305: JP21.3 R40.1 77.47,10.71 | JP22.4 77.47,17.02 77.47,10.71 | R38.1 77.47,10.71
GND5
  Top 0.305: JP26.3 R48.1 93.22,10.71 | JP27.4 93.22,17.02 93.22,10.71 | R46.1 93.22,10.71
GND6
  Top 0.305: JP31.3 R56.1 14.48,23.91 | JP32.4 14.48,30.23 14.48,23.91 | R54.1 14.48,23.91
GND7
  Top 0.305: JP36.3 R64.1 30.23,23.91 | JP37.4 30.23,30.23 30.23,23.91 | R62.1 30.23,23.91
GND8
  Top 0.305: JP41.3 R72.1 45.97,23.91 | JP42.4 45.97,30.23 45.97,23.91 | R70.1 45.97,23.91
GND9
  Top 0.305: JP46.3 R80.1 61.72,23.91 | JP47.4 61.72,30.23 61.72,23.91 | R78.1 61.72,23.91
GND10
  Top 0.305: JP51.3 R88.1 77.47,23.91 | JP52.4 77.47,30.23 77.47,23.91 | R86.1 77.47,23.91
GND11
  Top 0.305: JP56.3 R96.1 93.22,23.91 | JP57.4 93.22,30.23 93.22,23.91 | R94.1 93.22,23.91
GND12
  Top 0.305: JP61.3 R104.1 14.48,37.12 | JP62.4 14.48,43.43 14.48,37.12 | R102.1 14.48,37.12
GND13